# Altium PCB PCB (p2).PcbDoc
Units mm, origin at the board's own origin, x right, y up, seen from the top; angles counter-clockwise.
Board outline 81.75 x 75.25 mm, 2 copper layers (Top Layer, Bottom Layer); 12 components, 33 nets, 73 pads, 5 vias.
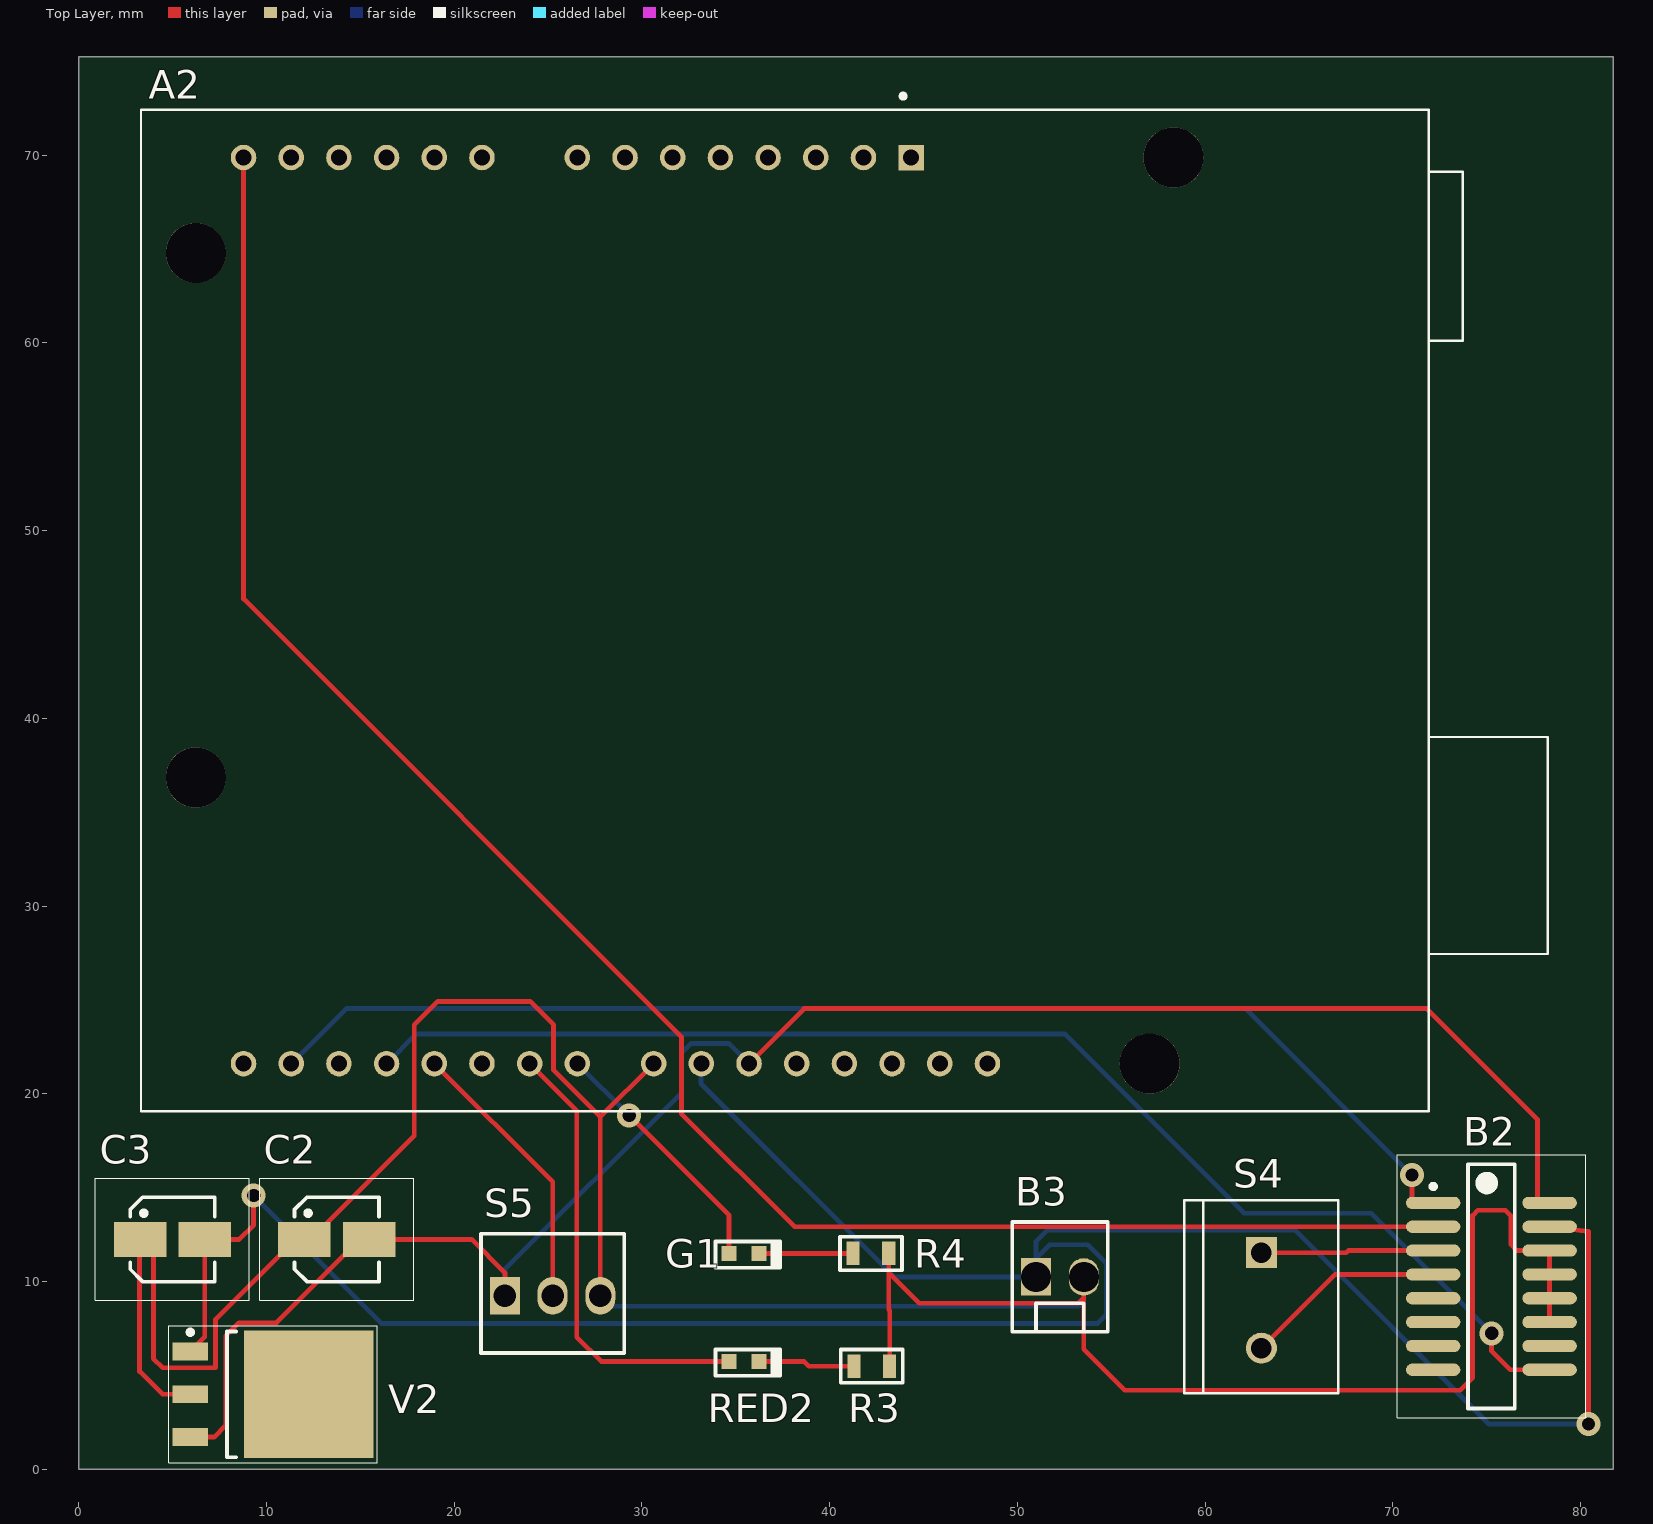
[diagram p0: Top Layer view]
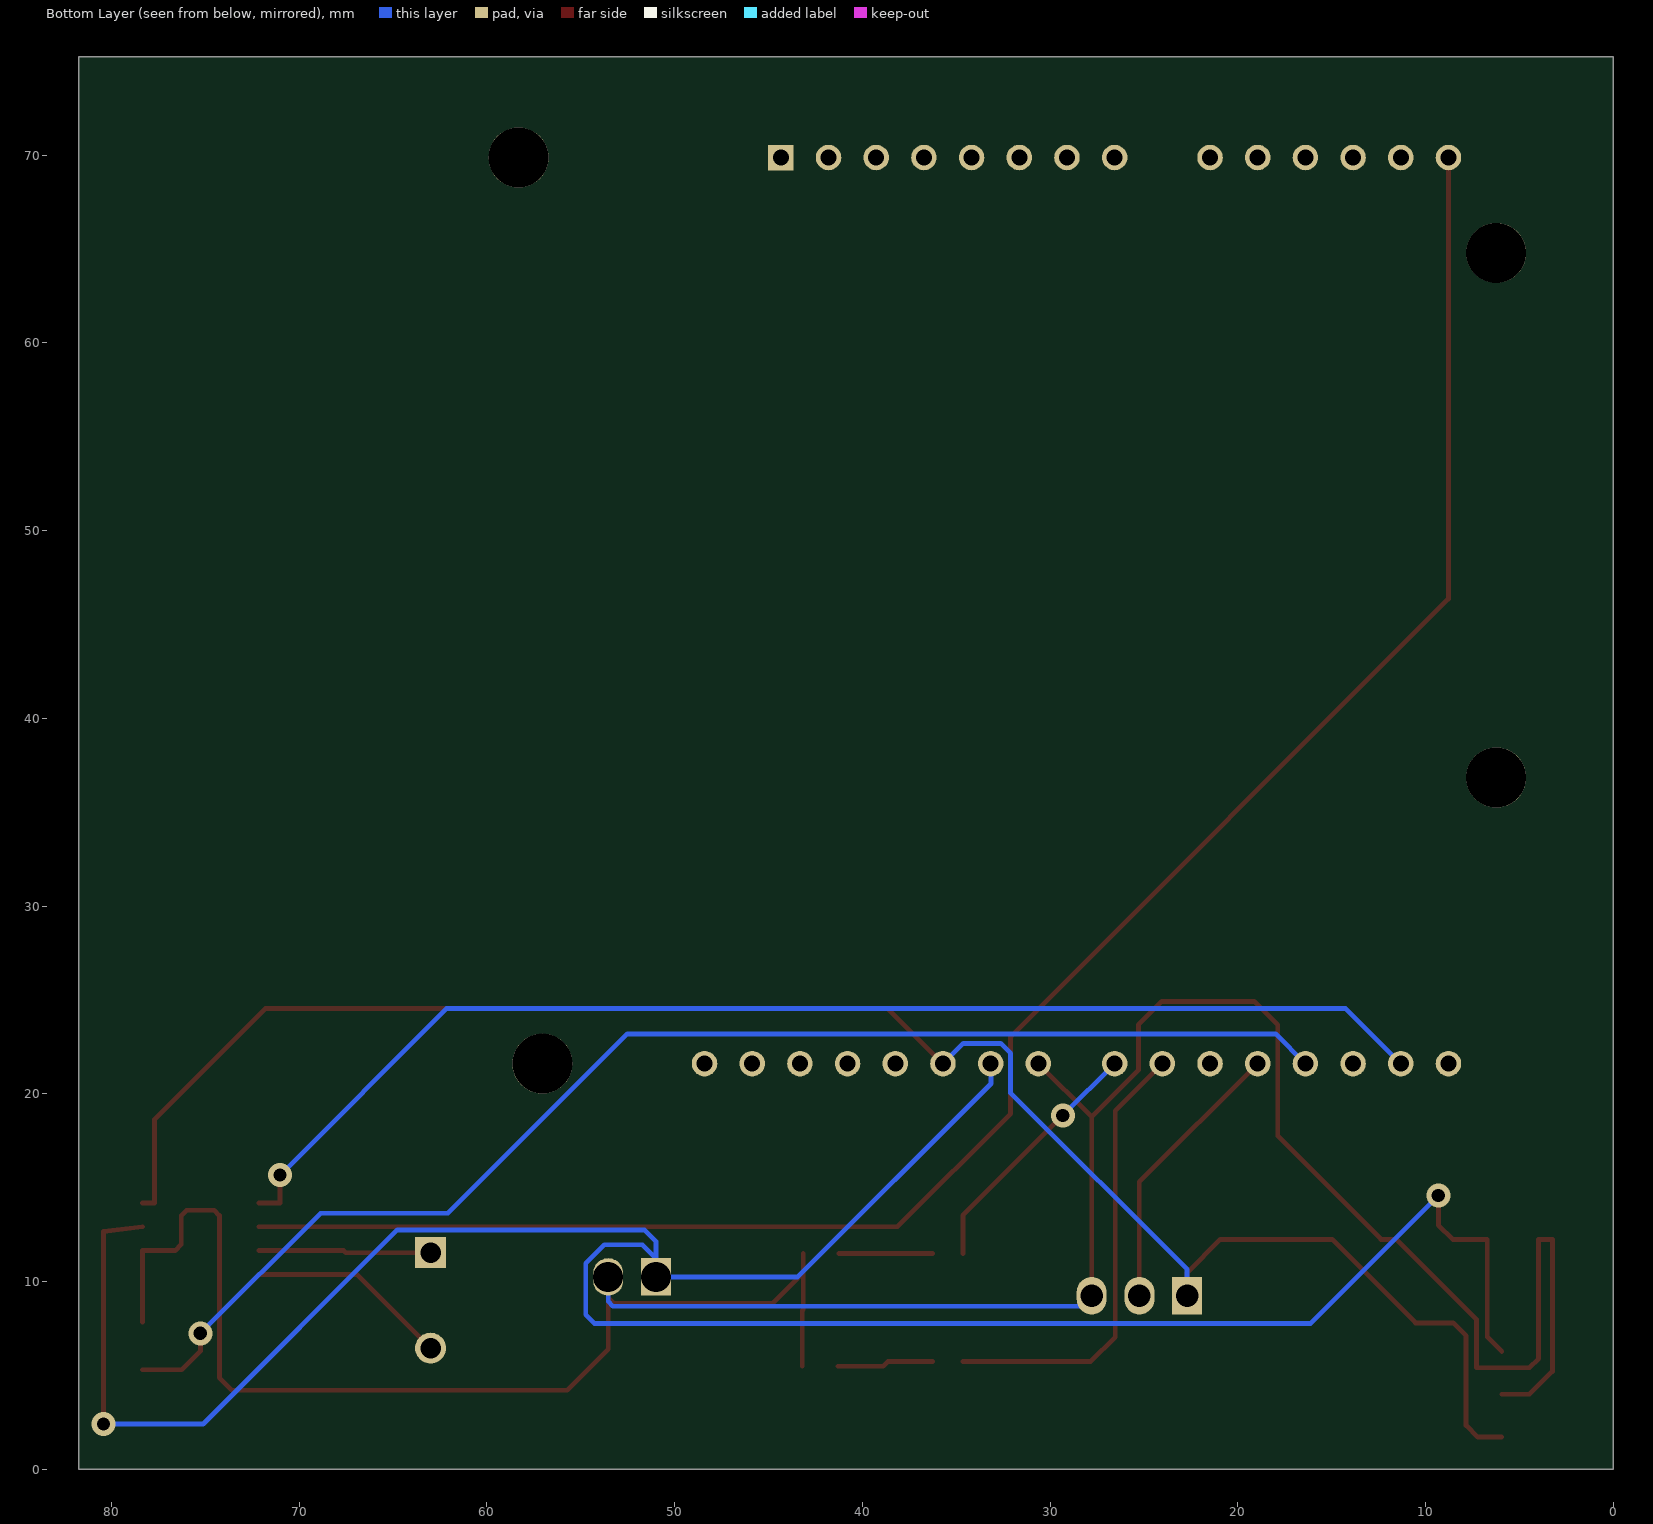
[diagram p1: Bottom Layer view, seen from below]
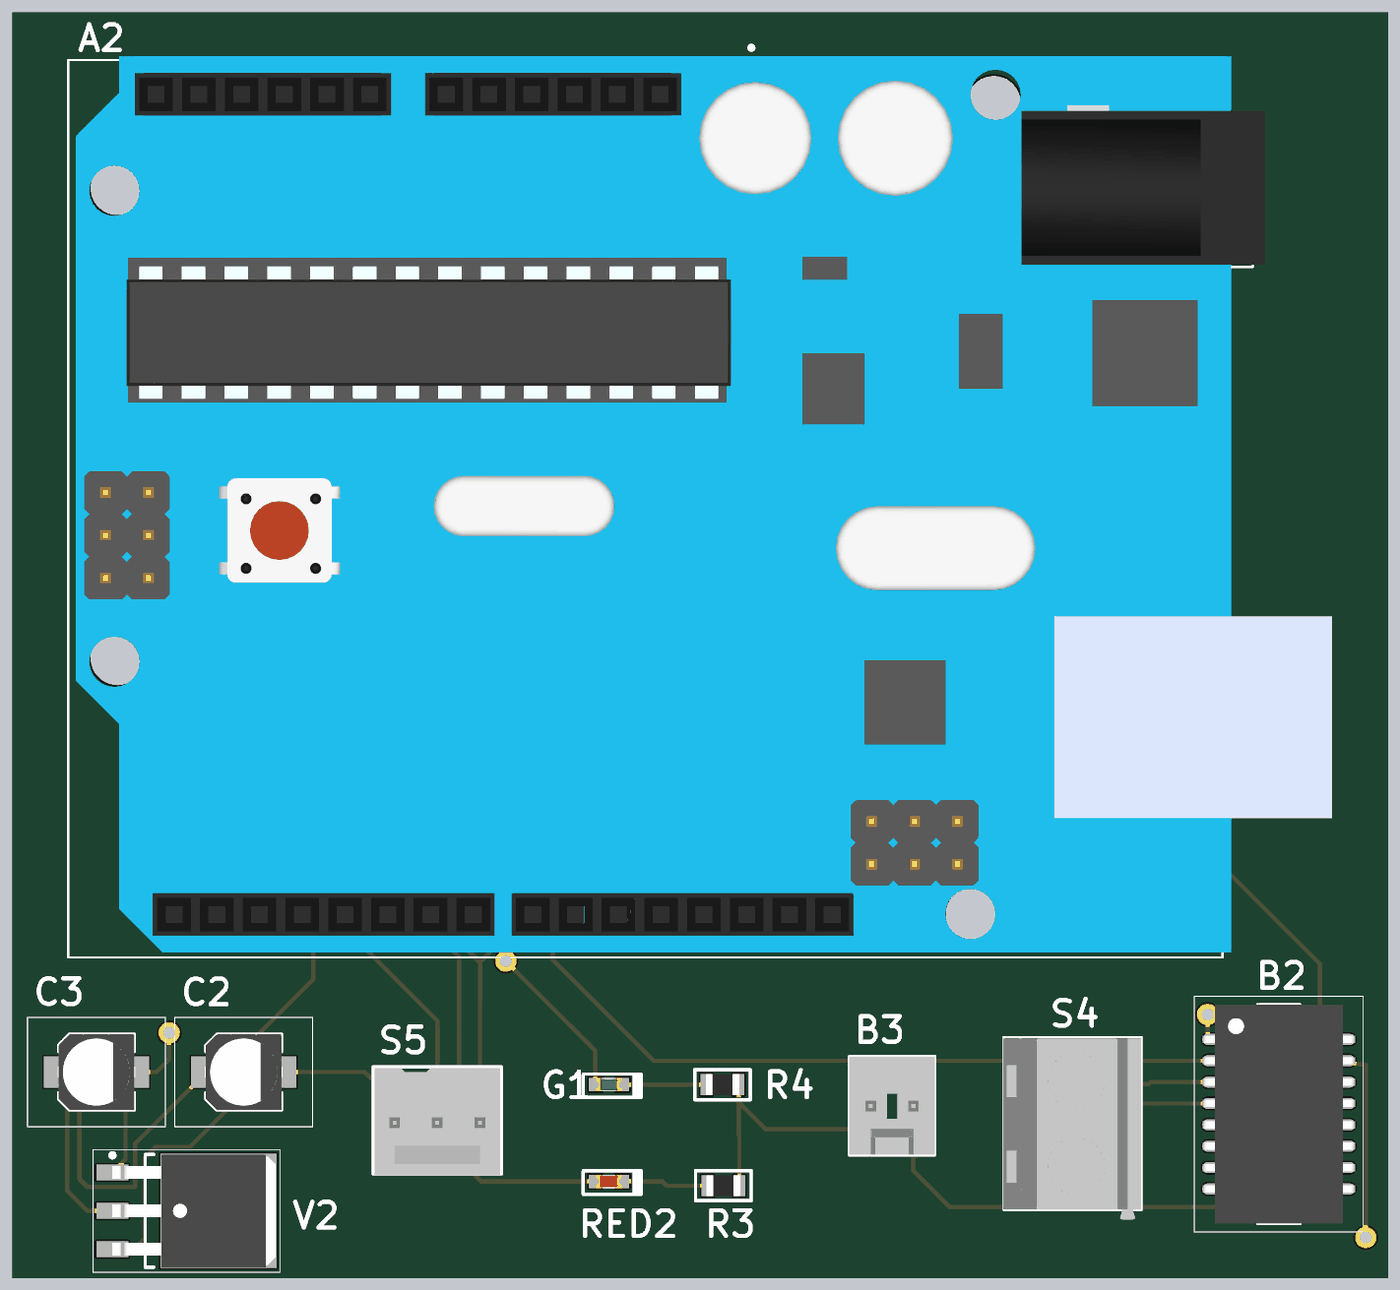
[diagram p2: 3D render of the assembled board from above, using the file's embedded part models]

## Layer stack, top to bottom
Top Solder: solder mask 0.0102, Solder Resist, Dk 3.5
Top Layer: signal copper 0.0356
Dielectric 1: dielectric 0.32, FR-4, Dk 4.8
Bottom Layer: signal copper 0.0356
Bottom Solder: solder mask 0.0102, Solder Resist, Dk 3.5

## Board outline
0,0 81.75,0 81.75,75.25 0,75.25

## Design rules (kind name [scope] priority, off if disabled: settings)
Clearance [All] p1: gap=0.254 ignorepadtopadclearanceinfootprint=FALSE except(0: Arc-Hole Track-Hole SMDPad-Hole THPad-Hole Via-Hole Fill-Hole Poly-Hole Region-Hole Text-Hole)
HoleSize [All] p1: absolutevalues=TRUE maxlimit=10 minlimit=0 maxpercent=80.000 minpercent=20.000
PolygonConnect [All] p1: connectstyle=Relief reliefconductorwidth=0.254 reliefentries=4 polygonreliefangle="90 Angle" airgapwidth=0.254
RoutingVias [All] p1: holewidth=0.3 width=0.6 viastyle="Through Hole" minholewidth=0.3 minwidth=0.6 maxholewidth=0.3 maxwidth=0.6
SilkToSolderMaskClearance [IsPad] p1: minsilkscreentomaskgap=0 clearancetoexposedcopper=TRUE
SolderMaskExpansion [All] p1: expansion=0.102
Width [All] p1: maxlimit=0.254 minlimit=0.254 preferedwidth=0.254
28 further rules are at their usual default settings.

## Components (designator, comment, footprint, x,y, rotation, side; value= is the part's Value field where it differs from the comment)
A2 "Arduino Uno" "Arduino Uno" 38.25,46.25 r270 top
B2 "H-Bridge" H-Bridge 75.25,9.75 r0 top
B3 "9V Battery" "9V Battery" 52.27,10.25 r90 top
C2 "10uF" 10uF 13.75,12.25 r0 top
C3 "100uF" 100uF 5,12.25 r0 top
G1 "Green" Green 35.45,11.5 r180 top
R3 "560 Ohm" 560 42.25,5.5 r180 top
R4 "560 Ohm" 560 42.2,11.5 r180 top
RED2 "Red" RED 35.45,5.75 r180 top
S4 "Screw Terminal Blocks" Screw 63,9 r270 top
S5 "Servo Motor" "Servo Motor" 25.25,9.25 r90 top
V2 "Voltage Regular" "Voltage regulator" 10.35,4 r0 top

## Footprints (in the part's own frame and the unit in brackets; to place one, negate y for a bottom-side part, rotate by r counter-clockwise, add the part's x,y. Pads: shape width x height; smd on the part's side, far side on the other; paste and mask are expansions set on the pad)
"9V Battery" [mm]
  rect 2x1.6 hole 1.6: 1(0,1.27)
  oval 2x1.6 hole 1.6: 2(0,-1.27)
  silkscreen extent -2.92,-2.54 2.92,2.54, body extent -2.9,-2.54 2.9,2.54, height 11.71
10uF [mm] "Aluminum Electrolytic Capacitor, Body 4.30x4.30x6.30mm, IPC Low Density"
  rect 2.8x1.85 smd: 1(-1.725,0) 2(1.725,0)
  silkscreen extent -4.1,-3.25 4.1,3.25, body extent -2.3,-2.25 2.3,2.25, height 6.3
100uF [mm]
  rect 2.8x1.85 smd: 1(-1.725,0) 2(1.725,0)
  silkscreen extent -4.1,-3.25 4.1,3.25, body extent -2.3,-2.25 2.3,2.25, height 6.3
560 [mm]
  rect 0.7x1.25 smd: 1(-0.95,0) 2(0.95,0)
  silkscreen extent -1.65,-0.89 1.65,0.89, body extent -1,-0.62 1,0.63, height 0.61
"Arduino Uno" [mil]
  rect 53.46x53.46 hole 33.46: 1(-930,240)
  round 53.46 hole 33.46: 2(-930,140) 3(-930,40) 4(-930,-60) 5(-930,-160) 6(-930,-260) 7(-930,-360) 8(-930,-460) 9(-930,-660) 10(-930,-760) 11(-930,-860) 12(-930,-960) 13(-930,-1060) 14(-930,-1160) 15(970,-1160) 16(970,-1060) 17(970,-960) 18(970,-860) 19(970,-760) 20(970,-660) 21(970,-560) 22(970,-460) 23(970,-300) 24(970,-200) 25(970,-100) 26(970,0) 27(970,100) 28(970,200) 29(970,300) 30(970,400)
  round 125.98 hole 125.98 unplated: None(-930,790) None(-730,-1260) None(370,-1260) None(970,740)
  silkscreen extent -1063,-1375 1070,1575, body extent -1039,-1357 1059,1582, height 503
Green [mm]
  rect 0.8x0.8 smd: 1(-0.8,0) 2(0.8,0)
  silkscreen extent -1.9,-0.64 1.52,0.76, body extent -0.8,-0.4 0.8,0.4, height 0.6
H-Bridge [mm] "SOJ, 16-Leads, Body 13.00x8.66mm, Pitch 1.27mm, IPC Low Density"
  oval 2.9x0.65 smd: 1(-3.1,4.445) 2(-3.1,3.175) 3(-3.1,1.905) 4(-3.1,0.635) 5(-3.1,-0.635) 6(-3.1,-1.905) 7(-3.1,-3.175) 8(-3.1,-4.445) 9(3.1,-4.445) 10(3.1,-3.175) 11(3.1,-1.905) 12(3.1,-0.635) 13(3.1,0.635) 14(3.1,1.905) 15(3.1,3.175) 16(3.1,4.445)
  silkscreen extent -5.03,-7 5.02,7, body extent -4.53,-6.5 4.53,6.5, height 3.56
RED [mm]
  rect 0.8x0.8 smd: 1(-0.8,0) 2(0.8,0)
  silkscreen extent -1.91,-0.63 1.52,0.76, body extent -0.8,-0.4 0.8,0.4, height 0.6
Screw [mm]
  rect 1.65x1.65 hole 1.1: 1(-2.54,0)
  round 1.65 hole 1.1: 2(2.54,0)
  silkscreen extent -5.33,-4.1 4.95,4.1, body extent -5.25,-4.14 5.51,4.06, height 10.01
"Servo Motor" [mm]
  rect 2x1.6 hole 1.2: 1(0,2.54)
  oval 2x1.6 hole 1.2: 2(0,0) 3(0,-2.54)
  silkscreen extent -3.05,-3.81 3.3,3.81, body extent -3.1,-3.73 3.25,3.73, height 10.68
"Voltage regulator" [mm] "D-PAK, 4-Pads, Body 6.20x6.72mm (max), IPC Medium Density"
  rect 1.9x0.95 smd: 1(-4.4,2.28) 2(-4.4,0) 3(-4.4,-2.28)
  rect 6.9x6.8 smd: 4(1.9,0)
  silkscreen extent -5.55,-3.65 5.55,3.65, body extent -4.42,-3.35 5.28,3.35, height 2.38

## Part data
A2: library part MSP430FR5739IDA, "16-bit Microcontrollers - MCU Mixed Signal MCU", Case/Package=TSSOP, Frequency=24MHz, Manufacturer="Texas Instruments", Max Operating Temperature=85°C, Max Supply Voltage=3.6V, Min Operating Temperature=-40°C, Min Supply Voltage=2V, Package Quantity=40, Supplier Part Number 1=1050-1024-ND, ComponentLink1Description=https://datasheet.ciiva.com/23612/1641704-23612987.pdf?src-supplier=Newark, ComponentLink1URL=https://datasheet.ciiva.com/23612/1641704-23612987.pdf?src-supplier=Newark, ComponentLink2Description=https://datasheet.ciiva.com/14380/msp430fr5720-14380986.pdf?src-supplier=Avnet, ComponentLink2URL=https://datasheet.ciiva.com/14380/msp430fr5720-14380986.pdf?src-supplier=Avnet, Core Architecture=MSP430, Data Bus Width=16b, Height=1.05mm, Interface=I2C,SPI,IrDA,UART,USART,LIN,SCI, Lead Free="Lead Free", Length=12.6mm, Manufacturer Part Number=MSP430FR5739IDA, Max Frequency=24MHz, Memory Size=16KB, Memory Type=FRAM,ROMless, Number of A/D Converters=14, Number of ADC Channels=14, Number of GPIO=33, Number of I2C Channels=1, Number of I/Os=30, Number of Pins=38, Number of Programmable I/O=30, Number of SPI Channels=3, Number of Timers/Counters=5, Number of UART Channels=2, Oscillator Type=Internal, Packaging=Rail/Tube, Peripherals="Brown-out Detect/Reset,POR,PWM,WDT", Radiation Hardening=No, RAM Size=1KB, REACH SVHC="No SVHC", RoHS=Yes, Supplier 1=Digi-Key, Watchdog Timer=Yes, Width=6.2mm
B2: library part SN754410NE, "TEXAS INSTRUMENTS - SN754410NE - IC, PERIPHERAL DRIVER, HALF-H, 1A, DIP16", Case/Package=PDIP, Manufacturer="Texas Instruments", Max Operating Temperature=85°C, Max Output Current=2A, Max Power Dissipation=2.075W, Max Supply Voltage=36V, Min Operating Temperature=-40°C, Min Supply Voltage=4.5V, Output Current=1.1A, Package Quantity=25, Supplier Part Number 1=3118977, ComponentLink1Description=http://www.ti.com/general/docs/lit/getliterature.tsp?genericPartNumber=SN754410&&fileType=pdf&src-supplier=Avnet, ComponentLink1URL=http://www.ti.com/general/docs/lit/getliterature.tsp?genericPartNumber=SN754410&&fileType=pdf&src-supplier=Avnet, ComponentLink2Description=https://www.verical.com/server-webapp/html/getDatasheet?partID=186188&src-supplier=Verical, ComponentLink2URL=https://www.verical.com/server-webapp/html/getDatasheet?partID=186188&src-supplier=Verical, ComponentLink3Description=http://www.jameco.com/Jameco/Products/ProdDS/1054684.pdf?src-supplier=Jameco, ComponentLink3URL=http://www.jameco.com/Jameco/Products/ProdDS/1054684.pdf?src-supplier=Jameco, ComponentLink4Description=http://www.rapidonline.com/pdf/82-0203.pdf?src-supplier=Rapid+Electronics, ComponentLink4URL=http://www.rapidonline.com/pdf/82-0203.pdf?src-supplier=Rapid+Electronics, ComponentLink5Description=http://focus.ti.com/lit/ds/symlink/sn754410.pdf?src-supplier=Avnet+Europe, ComponentLink5URL=http://focus.ti.com/lit/ds/symlink/sn754410.pdf?src-supplier=Avnet+Europe, Contact Plating=Gold, Height=4.57mm, Lead Free="Lead Free", Length=19.8mm, Manufacturer Part Number=SN754410NE, Mount="Through Hole", Number of Circuits=4, Number of Drivers=4, Number of Outputs=4, Number of Pins=16, Output Voltage=36V, Packaging=Rail/Tube, Radiation Hardening=No, REACH SVHC="No SVHC", Supplier 1=Farnell, Weight=0.03357oz, Width=6.35mm
B3: library part 6LF22XWA/B, "BATTERY ALKALINE 9V", Manufacturer=Panasonic, Max Operating Temperature=54°C, Min Operating Temperature=-20°C, Output Voltage=9V, Package Quantity=210, Supplier Part Number 1=P687-ND, Chemistry/Technology=Alkaline, ComponentLink1Description=http://www.mouser.com/ds/2/315/panasonic_alkaline_batteries_9v_series_6lf22xwa-541606.pdf?src-supplier=Mouser, ComponentLink1URL=http://www.mouser.com/ds/2/315/panasonic_alkaline_batteries_9v_series_6lf22xwa-541606.pdf?src-supplier=Mouser, ComponentLink2Description=https://na.industrial.panasonic.com/sites/default/pidsa/files/downloads/files/panasonic-6lf22xwa-datasheet.pdf?src-supplier=Digi-Key, ComponentLink2URL=https://na.industrial.panasonic.com/sites/default/pidsa/files/downloads/files/panasonic-6lf22xwa-datasheet.pdf?src-supplier=Digi-Key, Height=0.69inch, Lead Free="Lead Free", Length=1.91inch, Manufacturer Part Number=6LF22XWA/B, Packaging=Bulk, Pricing 1="1=1.90000, 10=1.58300, 50=1.37860, 210=1.30290, 420=1.21200, 630=1.14383, 1050=1.07565, 2520=1.00748 (USD)", RoHS=No, Stock 1=27519, Supplier 1=Digi-Key, Termination="Snap in", Voltage Rating=9V, Weight=45.59g, Width=0.51inch
C2: library part UCY2G100MPD1TD, "Cap Aluminum Lytic 10uF 400V 20% (10 X 16mm) Radial 5mm 150mA 8000h 105C Ammo Pack", Case/Package=Radial, Manufacturer=Nichicon, Max Operating Temperature=105°C, Min Operating Temperature=-40°C, Package Quantity=500, Ripple Current=150mA, Supplier Part Number 1=493-13313-1-ND, Tolerance=20%, Voltage Rating=400V, Capacitance=10uF, ComponentLink1Description=http://nichicon-us.com/english/products/pdfs/e-mi_tape.pdf?src-supplier=Digi-Key, ComponentLink1URL=http://nichicon-us.com/english/products/pdfs/e-mi_tape.pdf?src-supplier=Digi-Key, Diameter=10mm, Height=16mm, Height - Seated (Max)=0.688inch, Lead Diameter=0.6mm, Lead Free="Lead Free", Lead Pitch=5mm, Life (Hours)=8000Hour, Manufacturer Part Number=UCY2G100MPD1TD, Mount="Through Hole", Packaging="Tape and Reel", Pricing 1="1=0.84, 10=0.619, 100=0.4245 (USD)", Radiation Hardening=No, Stock 1=105637, Supplier 1=Digi-Key, Termination=Radial
C3: Supplier Part Number 1=493-3938-6-ND, Supplier 1=Digi-Key
G1: library part LTST-C191KGKT, "LED Uni-Color Green 574nm 2-Pin Chip LED T/R", Case/Package=0603, Case Code (Metric)=1608, Forward Current=30mA, Forward Voltage=2V, Lens Color=Colorless, Manufacturer="Vishay Lite-On", Max Operating Temperature=85°C, Max Power Dissipation=75mW, Min Operating Temperature=-55°C, Package Quantity=1, Reverse Voltage=5V, Supplier Part Number 1=160-1446-1-ND, Test Current=20mA, Case Code (Imperial)=0603, Color=Green, ComponentLink1Description=http://optoelectronics.liteon.com/upload/download/DS22-2000-228/LTST-C191KGKT.PDF?src-supplier=Digi-Key, ComponentLink1URL=http://optoelectronics.liteon.com/upload/download/DS22-2000-228/LTST-C191KGKT.PDF?src-supplier=Digi-Key, Depth=0.8mm, Dominant Wavelength=571nm, Height=0.55mm, Illumination Color=Green, Lead Free="Lead Free", Length=1.6mm, Lens Style=Rectangular,Colorless, Lens Transparency=Clear, Luminous Intensity=35mcd, Manufacturer Part Number=LTST-C191KGKT, Mount="Surface Mount", Number of Elements=1, Number of LEDs=1, Number of Pins=2, Packaging="Tape and Reel", Power Dissipation=75mW, Power Rating=75mW, Pricing 1="1=0.28, 10=0.201, 100=0.0954, 500=0.06364, 1000=0.04984, 2500=0.04878 (USD)", Radiation Hardening=No, Stock 1=788187, Supplier 1=Digi-Key, Viewing Angle=130°, Wavelength=574nm, Width=0.8mm
R3 R4: library part 1623252-1, "Res Thick Film 0805 560 Ohm 1% 0.125W(1/8W) ±100ppm/°C Molded SMD", Case/Package=0805, Manufacturer="TE Connectivity", Max Operating Temperature=125°C, Max Power Dissipation=125mW, Min Operating Temperature=-55°C, Package Quantity=5000, Resistance=560R, Supplier Part Number 1=A126376CT-ND, Temperature Coefficient=100ppm/°C, Tolerance=1%, ComponentLink1Description=https://datasheet.ciiva.com/2530/eng-cd-1623252-ba-2530165.pdf?src-supplier=Digi-Key, ComponentLink1URL=https://datasheet.ciiva.com/2530/eng-cd-1623252-ba-2530165.pdf?src-supplier=Digi-Key, ComponentLink2Description=https://datasheet.ciiva.com/16904/eng-ds-1773204-f-16904630.pdf?src-supplier=Avnet+Europe, ComponentLink2URL=https://datasheet.ciiva.com/16904/eng-ds-1773204-f-16904630.pdf?src-supplier=Avnet+Europe, ComponentLink3Description=https://datasheet.ciiva.com/8903/eng-ds-1773204-f-8903597.pdf?src-supplier=Avnet, ComponentLink3URL=https://datasheet.ciiva.com/8903/eng-ds-1773204-f-8903597.pdf?src-supplier=Avnet, Composition="Thick Film", Depth=1.25mm, Height=0.026inch, Length=0.079inch, Manufacturer Part Number=1623252-1, Military Standard=Not, Number of Terminations=2, Packaging="Tape and Reel", Pricing 1="1=0.10000, 10=0.04900, 100=0.02000, 1000=0.00898, 2500=0.00780 (USD)", Radiation Hardening=No, RoHS=Yes, Stock 1=18530, Supplier 1=Digi-Key, Width=0.049inch
RED2: library part HSMC-C190, "AVAGO TECHNOLOGIES   HSMC-C190.   LED, SMD, RED", Case/Package=0603, Case Code (Metric)=1608, Forward Current=20mA, Forward Voltage=1.9V, Lens Color=White, Manufacturer="Broadcom Avago", Max Operating Temperature=85°C, Max Power Dissipation=60mW, Min Operating Temperature=-40°C, Package Quantity=1, Reverse Voltage=5V, Supplier Part Number 1=1278415P, Case Code (Imperial)=0603, Color=Red, ComponentLink1Description=https://www.verical.com/server-webapp/html/getDatasheet?partID=128083&src-supplier=Verical, ComponentLink1URL=https://www.verical.com/server-webapp/html/getDatasheet?partID=128083&src-supplier=Verical, ComponentLink2Description=http://uk.rs-online.com/webdocs/0db8/0900766b80db8814.pdf?src-supplier=RSComponents, ComponentLink2URL=http://uk.rs-online.com/webdocs/0db8/0900766b80db8814.pdf?src-supplier=RSComponents, ComponentLink3Description=https://www.distrelec.biz/Web/Downloads/_t/ds/HSMx-C110-170-190-191-150_eng_tds.pdf?mime=application%2Fpdf&src-supplier=Distrelec, ComponentLink3URL=https://www.distrelec.biz/Web/Downloads/_t/ds/HSMx-C110-170-190-191-150_eng_tds.pdf?mime=application%2Fpdf&src-supplier=Distrelec, ComponentLink4Description=http://www.farnell.com/datasheets/55913.pdf?src-supplier=Element14, ComponentLink4URL=http://www.farnell.com/datasheets/55913.pdf?src-supplier=Element14, ComponentLink5Description=http://www.produktinfo.conrad.com/datenblaetter/175000-199999/180490-da-01-en-CHIP_LED_HSMC_C190_ROT.pdf?src-supplier=Conrad, ComponentLink5URL=http://www.produktinfo.conrad.com/datenblaetter/175000-199999/180490-da-01-en-CHIP_LED_HSMC_C190_ROT.pdf?src-supplier=Conrad, Depth=0.8mm, Dominant Wavelength=626nm, Height=0.8mm, Illumination Color=Red, Lead Free="Lead Free", Length=1.6mm, Lens Style=Rectangular,Diffused,Colorless, Lens Transparency=Diffused, Luminous Intensity=90mcd, Manufacturer Part Number=HSMC-C190, Mount="Surface Mount", Number of Elements=1, Number of LEDs=1, Number of Pins=2, Packaging="Tape and Reel", Power Dissipation=60mW, Power Rating=60mW, Radiation Hardening=No, REACH SVHC="No SVHC", Supplier 1=RSComponents, Test Current=20mA, Viewing Angle=170°, Voltage Rating (DC)=1.9V, Wavelength=626nm, Width=0.8mm
S4: library part 1988956, "TERM BLOCK 2POS 45DEG 3.5MM PCB", Color=Green, Current=10A, Current Rating=17.5A, Flammability Rating="UL94 V-0", Manufacturer="Phoenix Contact", Max Supply Voltage=160V, Package Quantity=250, Supplier Part Number 1=7176659, Voltage=300V, Approvals=UL, ComponentLink1Description=https://datasheet.ciiva.com/16051/1988956-16051359.pdf?src-supplier=Onlinecomponents.com, ComponentLink1URL=https://datasheet.ciiva.com/16051/1988956-16051359.pdf?src-supplier=Onlinecomponents.com, ComponentLink2Description=https://datasheet.ciiva.com/26340/567541-da-01-de-printklemme-1988956-250-st-26340451.pdf?src-supplier=Conrad, ComponentLink2URL=https://datasheet.ciiva.com/26340/567541-da-01-de-printklemme-1988956-250-st-26340451.pdf?src-supplier=Conrad, ComponentLink3Description=https://datasheet.ciiva.com/824/combiconcompactseries-824224.pdf?src-supplier=Digi-Key, ComponentLink3URL=https://datasheet.ciiva.com/824/combiconcompactseries-824224.pdf?src-supplier=Digi-Key, ComponentLink4Description=https://datasheet.ciiva.com/14609/70055171-14609100.pdf?src-supplier=Allied+Electronics, ComponentLink4URL=https://datasheet.ciiva.com/14609/70055171-14609100.pdf?src-supplier=Allied+Electronics, Contact Material=Tin, Depth=11.2mm, Gender=Male, Height=11.2mm, Housing Color=Green, Housing Material=Polyamide, Lead Free="Lead Free", Length=7mm, Manufacturer Part Number=1988956, Material=Polyamide, Max Current Rating=17.5A, Mount="Through Hole", Number of Circuits=2, Number of Contacts=2, Number of Levels=1, Number of Pins=2, Number of Poles=2, Number of Positions=2, Number of Positions Per Level=2, Number of Rows=1, Orientation=Straight, Packaging=Bulk, Pitch=3.5mm, RoHS=Yes, Supplier 1=RSComponents, Termination=Screw, Voltage Rating=160V, Weight=0.034216oz, Width=13.7mm, Wire Gauge (Max)=26AWG, Wire Gauge (Min)=16AWG
S5: library part 900-00008, "GEARMOTOR 6VDC SERVO", Manufacturer=Parallax, Max Operating Temperature=50°C, Min Operating Temperature=-10°C, Operating Supply Voltage=6V, Package Quantity=1, Supplier Part Number 1=7813046, Approvals=CE, ComponentLink1Description=https://datasheet.ciiva.com/4927/crservo-8470-4927809.pdf?src-supplier=Mouser, ComponentLink1URL=https://datasheet.ciiva.com/4927/crservo-8470-4927809.pdf?src-supplier=Mouser, ComponentLink2Description=https://datasheet.ciiva.com/30483/0900766b8123f8a1-30483945.pdf?src-supplier=RSComponents, ComponentLink2URL=https://datasheet.ciiva.com/30483/0900766b8123f8a1-30483945.pdf?src-supplier=RSComponents, ComponentLink3Description=https://datasheet.ciiva.com/27048/283039-27048842.pdf?src-supplier=Jameco, ComponentLink3URL=https://datasheet.ciiva.com/27048/283039-27048842.pdf?src-supplier=Jameco, ComponentLink4Description=https://datasheet.ciiva.com/3330/900-00008-eng-tds-3330493.pdf?src-supplier=Distrelec, ComponentLink4URL=https://datasheet.ciiva.com/3330/900-00008-eng-tds-3330493.pdf?src-supplier=Distrelec, ComponentLink5Description=https://datasheet.ciiva.com/2099/900-00008-continuous-rotation-servo-documentation-v2-2-2099203.pdf?src-supplier=Digi-Key, ComponentLink5URL=https://datasheet.ciiva.com/2099/900-00008-continuous-rotation-servo-documentation-v2-2-2099203.pdf?src-supplier=Digi-Key, Depth=19mm, Height=1inch, Length=406mm, Manufacturer Part Number=900-00008, Mounting Hole Spacing=1.988inch, Pricing 1="1=12.03000, 5=11.56000, 10=11.07000 (GBP)", RoHS=Yes, Stock 1=60, Supplier 1=RSComponents, Termination="Wire Leads", Weight=0.094lb, Width=55.8mm
V2: library part L78M05CDT-TR, "STMICROELECTRONICS   L78M05CDT-TR   LINEAR VOLTAGE REGULATOR, 5V, DPAK-3", Case/Package=TO-252, Dropout Voltage=2V, Manufacturer=STMicroelectronics, Max Input Voltage=35V, Max Operating Temperature=150°C, Max Output Current=500mA, Max Output Voltage=5V, Min Input Voltage=7V, Min Operating Temperature=0°C, Package Quantity=1, Power Supply Rejection Ratio (PSRR)=62dB, Quiescent Current=6mA, Supplier Part Number 1=2988592, Tolerance=5%, ComponentLink1Description=http://www.mouser.com/ds/2/389/l78m-974157.pdf?src-supplier=Mouser, ComponentLink1URL=http://www.mouser.com/ds/2/389/l78m-974157.pdf?src-supplier=Mouser, ComponentLink2Description=http://www.st.com/web/en/resource/technical/document/datasheet/CD00000447.pdf?src-supplier=Future+Electronics, ComponentLink2URL=http://www.st.com/web/en/resource/technical/document/datasheet/CD00000447.pdf?src-supplier=Future+Electronics, ComponentLink3Description=http://www.st.com/content/ccc/resource/technical/document/datasheet/d7/5f/dc/5c/d5/b6/48/7c/CD00000447.pdf/files/CD00000447.pdf/jcr:content/translations/en.CD00000447.pdf?src-supplier=Digi-Key, ComponentLink3URL=http://www.st.com/content/ccc/resource/technical/document/datasheet/d7/5f/dc/5c/d5/b6/48/7c/CD00000447.pdf/files/CD00000447.pdf/jcr:content/translations/en.CD00000447.pdf?src-supplier=Digi-Key, ComponentLink4Description=https://www.verical.com/server-webapp/html/getDatasheet?partID=111001&src-supplier=Verical, ComponentLink4URL=https://www.verical.com/server-webapp/html/getDatasheet?partID=111001&src-supplier=Verical, ComponentLink5Description=https://www.distrelec.biz/Web/Downloads/ta/_e/tbL78MxxC_data_e.pdf?mime=application%2Fpdf&src-supplier=Distrelec, ComponentLink5URL=https://www.distrelec.biz/Web/Downloads/ta/_e/tbL78MxxC_data_e.pdf?mime=application%2Fpdf&src-supplier=Distrelec, ComponentLink6Description=http://www.farnell.com/datasheets/1834365.pdf?src-supplier=Element14, ComponentLink6URL=http://www.farnell.com/datasheets/1834365.pdf?src-supplier=Element14, ComponentLink7Description=http://www.jameco.com/Jameco/Products/ProdDS/2021024.pdf?src-supplier=Jameco, ComponentLink7URL=http://www.jameco.com/Jameco/Products/ProdDS/2021024.pdf?src-supplier=Jameco, ComponentLink8Description=http://www.produktinfo.conrad.com/datenblaetter/1100000-1199999/001184659-da-01-en-IC_REG_LDO_5V_L78M05CDT_TR_TO_252_3_STM.pdf?src-supplier=Conrad, ComponentLink8URL=http://www.produktinfo.conrad.com/datenblaetter/1100000-1199999/001184659-da-01-en-IC_REG_LDO_5V_L78M05CDT_TR_TO_252_3_STM.pdf?src-supplier=Conrad, Contact Plating=Tin,Matte, Height=2.4mm, Lead Free="Lead Free", Length=6.6mm, Manufacturer Part Number=L78M05CDT-TR, Min Output Voltage=5V, Mount="Surface Mount", Nominal Output Voltage=5V, Number of Outputs=1, Number of Pins=3, Number of Regulators=1, Output Current=500mA, Output Type=Fixed, Output Voltage=5V, Packaging="Tape and Reel", Polarity=Positive, Radiation Hardening=No, REACH SVHC="No SVHC", Supplier 1=RSComponents, Weight=0.01lb, Width=6.2mm

## Via types
v1: diameter 1.27, hole 0.711, Top Layer to Bottom Layer, 5 vias

## Nets (pads, with @x,y where several pads share a name; then routed paths per layer and width w, separated by ;. In a path a pad name is that pad's centre, name@x,y a point inside that pad or via, vN(x,y) a via of type N, cw(c..) or ccw(c..) an arc to the next point about the centre after c; other vN are vias at no path point)
5V: A2.25 B2.16 C2.2 S5.1 V2.3 | length 97.7
  Top Layer w0.254: V2.3 7.228,1.72 7.85,2.342 7.85,7.117 8.536,7.803 10.541,7.803 14.988,12.25 C2.2 20.93,12.25 22.71,10.47 S5.1 ; A2.25 38.64,24.542 71.807,24.542 77.7,18.649 77.7,14.195 B2.16
  Bottom Layer w0.254: S5.1 22.71,10.648 32.107,20.045 32.107,22.154 32.641,22.687 34.635,22.687 A2.25
+5V: 
A0: 
A1: 
A2: 
A3: 
A4: 
A5: 
D0: 
D1: 
D2: 
D3: 
D4: 
D5: A2.14 B2.2 | length 103.1
  Top Layer w0.254: A2.14 8.786,46.364 32.107,23.043 32.107,18.954 38.136,12.925 B2.2
D6: 
D7: A2.16 B2.1 | length 67.2
  Top Layer w0.254: v1(71.02,15.677) 71.02,14.195 B2.1
  Bottom Layer w0.254: A2.16 14.256,24.542 62.155,24.542 v1(71.02,15.677)
D8: 
D9: A2.18 B2.9 | length 70.6
  Top Layer w0.254: v1(75.262,7.244) 75.262,6.296 76.252,5.305 B2.9
  Bottom Layer w0.254: A2.18 17.989,23.195 52.529,23.195 62.079,13.645 68.861,13.645 v1(75.262,7.244)
D10: A2.19 S5.2 | length 15
  Top Layer w0.254: A2.19 25.25,15.308 S5.2
D11: 
D12: A2.21 RED2.2 | length 24.3
  Top Layer w0.254: A2.21 26.54,19.098 26.54,7.05 27.84,5.75 RED2.2
D13: A2.22 G1.2 | length 13.5
  Top Layer w0.254: v1(29.326,18.852) 34.65,13.528 G1.2
  Bottom Layer w0.254: A2.22 v1(29.326,18.852)
GND: A2.23 B2.11 B2.12 B2.13 B2.14 B3.2 C2.1 C3.1 R3.1 R4.1 S5.3 V2.2 | length 170.5
  Top Layer w0.254: V2.2 4.472,4 3.253,5.219 3.253,12.25 C3.1 3.989,12.25 3.989,5.898 4.472,5.415 7.291,5.415 7.291,7.983 11.559,12.25 C2.1 12.373,12.25 17.883,17.76 17.883,23.678 19.128,24.923 24.055,24.923 25.3,23.678 25.3,21.266 27.792,18.774 ; A2.23 27.792,18.774 ; R4.1 43.15,10.47 ; R3.1 43.2,8.463 43.15,8.513 43.15,10.47 ; B3.2 53.54,9.144 ; B2.11 B2.12 B2.13 B2.14 76.608,11.655 76.278,11.985 76.278,13.518 75.998,13.797 74.525,13.797 74.246,13.518 74.246,4.882 73.585,4.222 55.724,4.222 53.54,6.406 53.54,9.144 ; 27.792,18.774 27.79,18.772 S5.3 27.792,18.774 ; 43.15,10.47 44.776,8.844 53.24,8.844 53.54,9.144
  Bottom Layer w0.254: S5.3 27.79,8.692 53.286,8.692 53.54,8.946 B3.2
NetB1_3: 
NetB1_4: 
NetB2_3: B2.3 S4.1 | length 9.2
  Top Layer w0.254: S4.1 67.515,11.54 67.63,11.655 B2.3
NetB2_4: B2.4 S4.2 | length 10.8
  Top Layer w0.254: S4.2 66.925,10.385 B2.4
NetG1_1: G1.1 R4.2 | length 5
  Top Layer w0.254: G1.1 R4.2
NetL1_3: 
NetL1_12: 
NetR2_1: 
NetR3_2: R3.2 RED2.1 | length 5.2
  Top Layer w0.254: RED2.1 38.635,5.75 38.885,5.5 R3.2
Vin: A2.24 B2.15 B3.1 C3.2 V2.1 | length 137.8
  Top Layer w0.254: V2.1 6.725,7.055 C3.2 8.563,12.25 9.323,13.01 v1(9.323,14.585) ; B2.15 80.418,12.671 v1(80.418,2.418)
  Bottom Layer w0.254: v1(9.323,14.585) 16.131,7.778 54.281,7.778 54.739,8.235 54.739,10.978 53.748,11.969 51.716,11.969 51,11.253 ; A2.24 33.149,21.612 33.149,20.554 43.461,10.241 51,10.241 B3.1 51,11.253 ; v1(80.418,2.418) 75.109,2.418 64.772,12.756 51.61,12.756 51,12.146 51,11.253
pads on no net: A2.1 A2.2 A2.3 A2.4 A2.5 A2.6 A2.7 A2.8 A2.9 A2.10 A2.11 A2.12 A2.13 A2.15 A2.17 A2.20 A2.26 A2.27 A2.28 A2.29 A2.30 A2.None B2.5 B2.6 B2.7 B2.8 B2.10 V2.4

## Silkscreen, mask and mechanical layers (free items; w line width, h text height)
Board Outline:
  the board outline again, w0.2